# Altium PCB B.PcbDoc
Units mil, origin at the board's own origin, x right, y up, seen from the top; angles counter-clockwise.
Board outline 3543 x 2362 mil, 4 copper layers (Top Layer, Internal Plane 1, Internal Plane 2, Bottom Layer); 23 components, 16 nets, 97 pads, 5 vias.
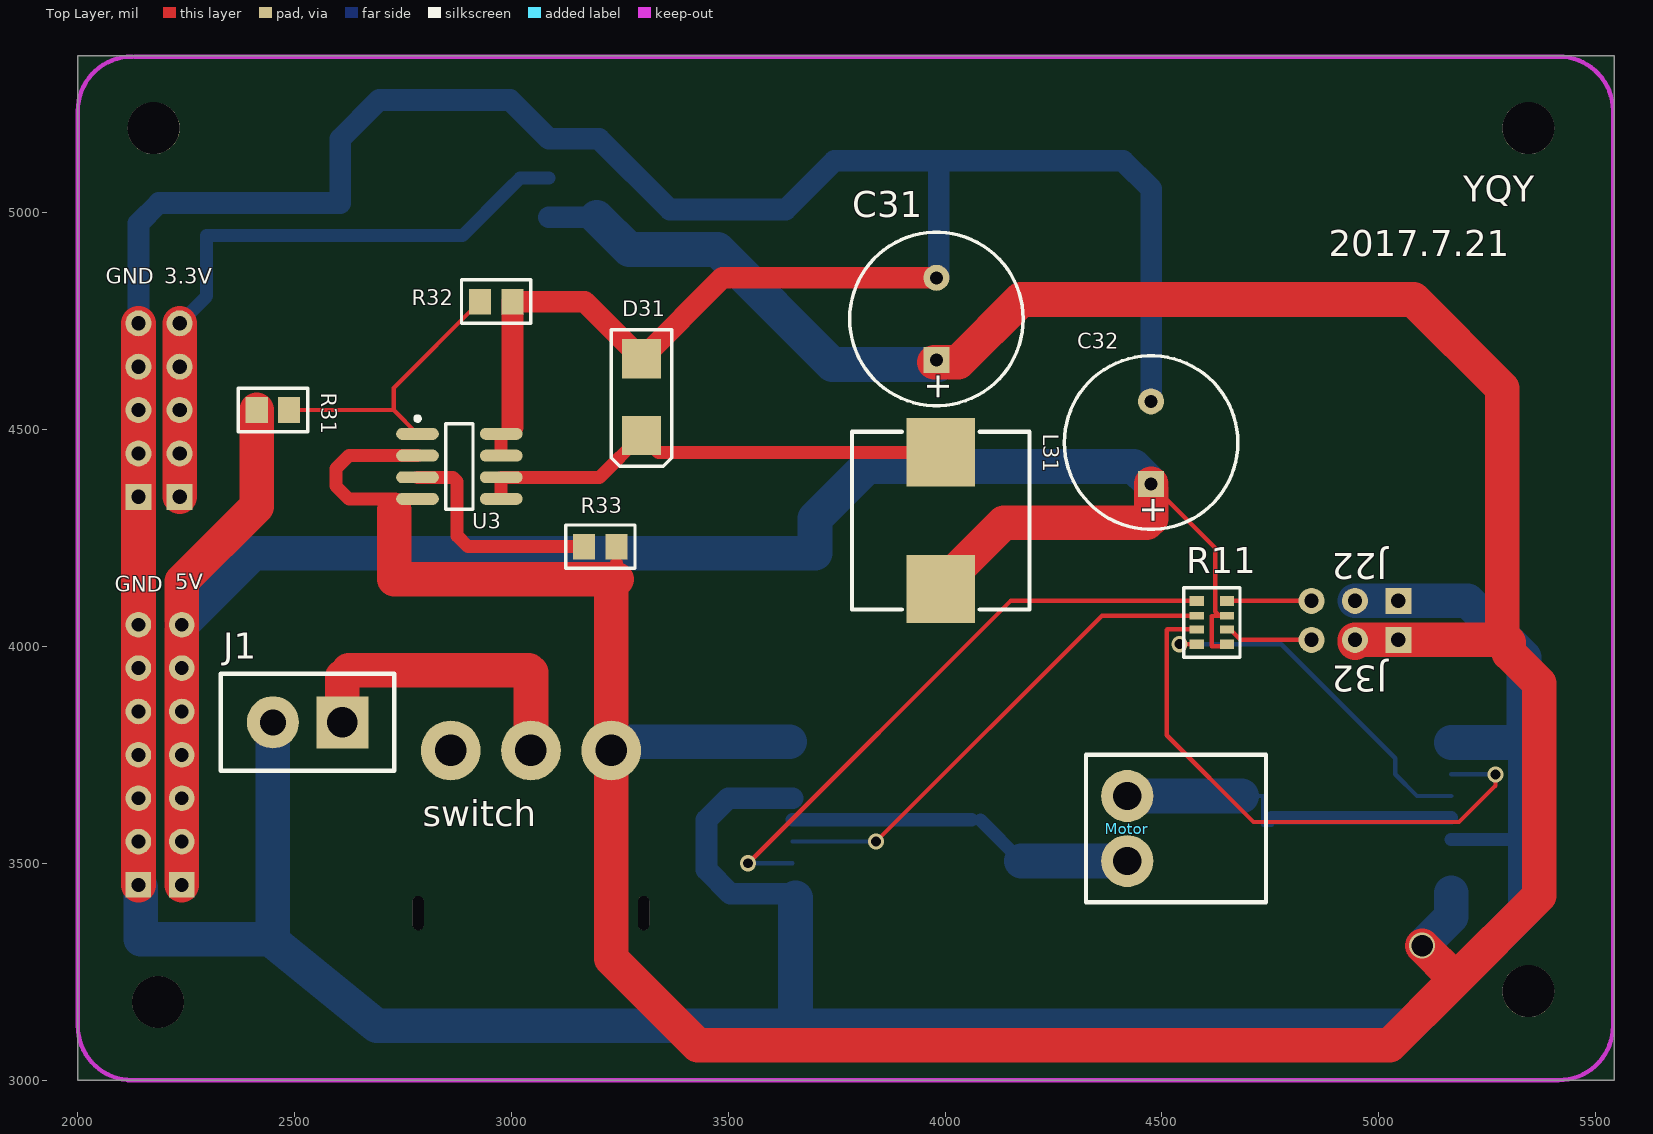
[diagram p0: Top Layer view]
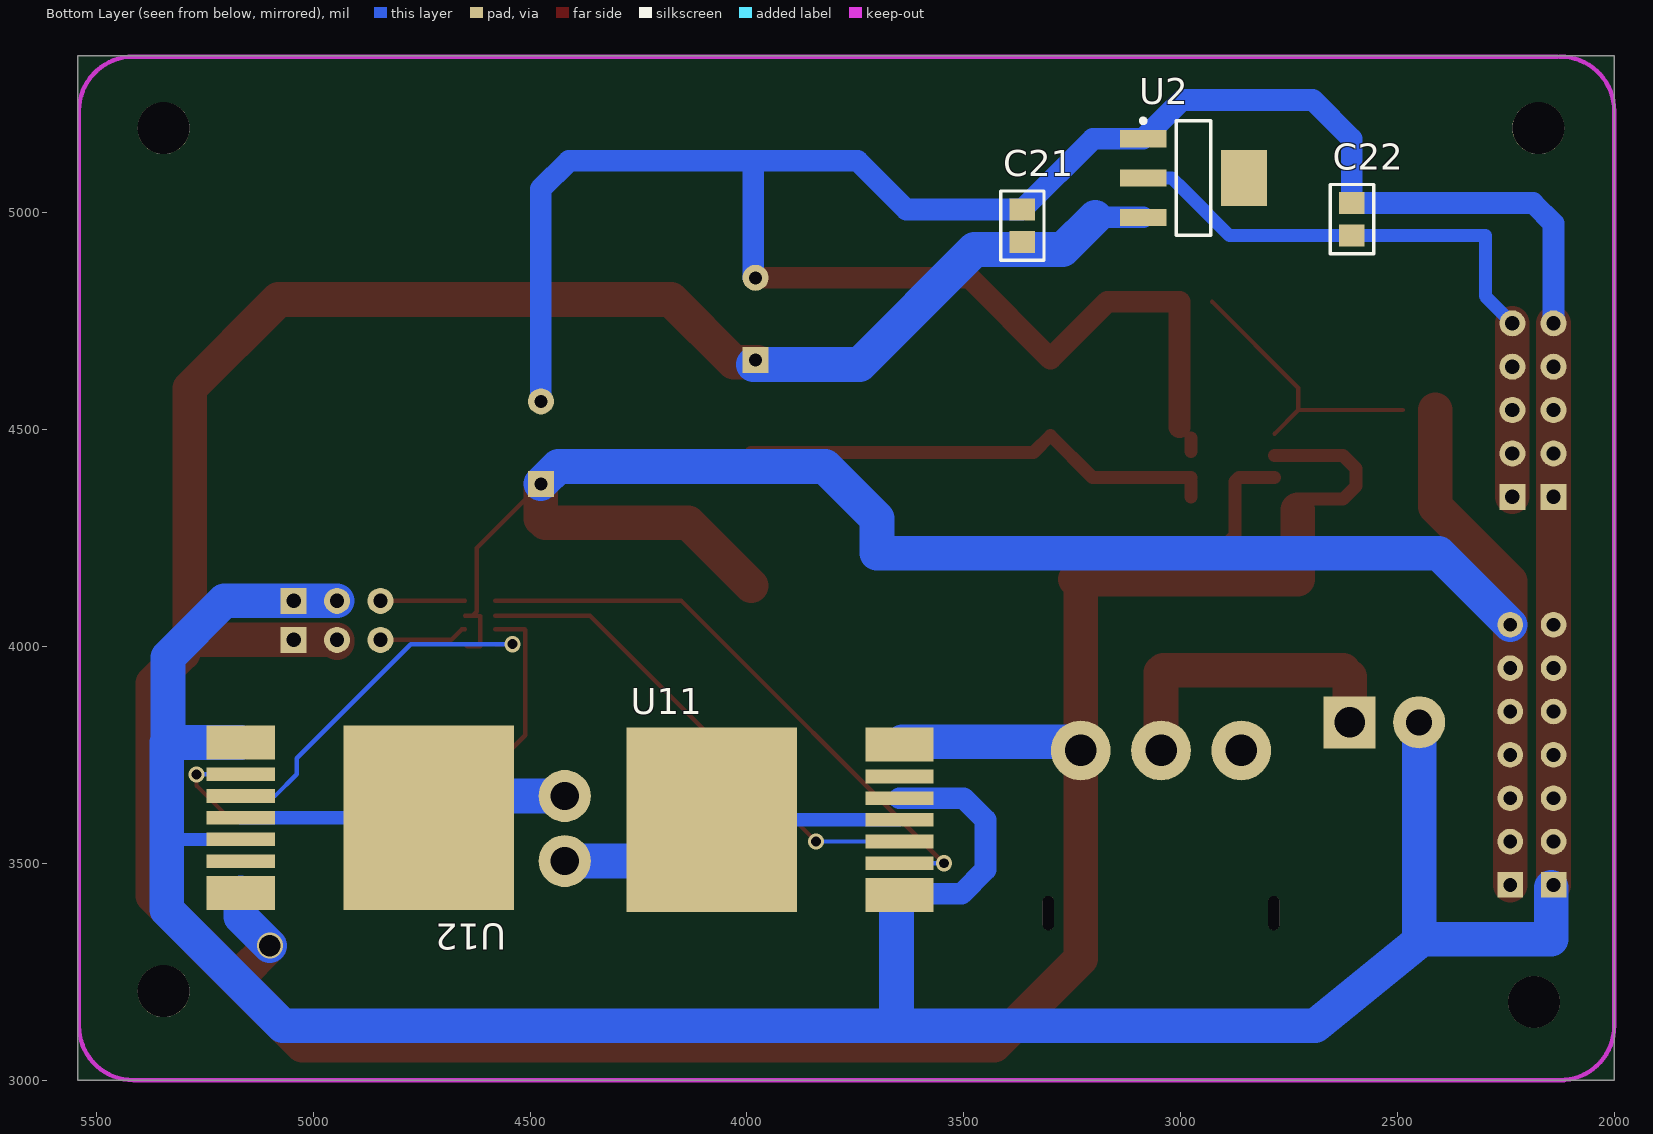
[diagram p1: Bottom Layer view, seen from below]
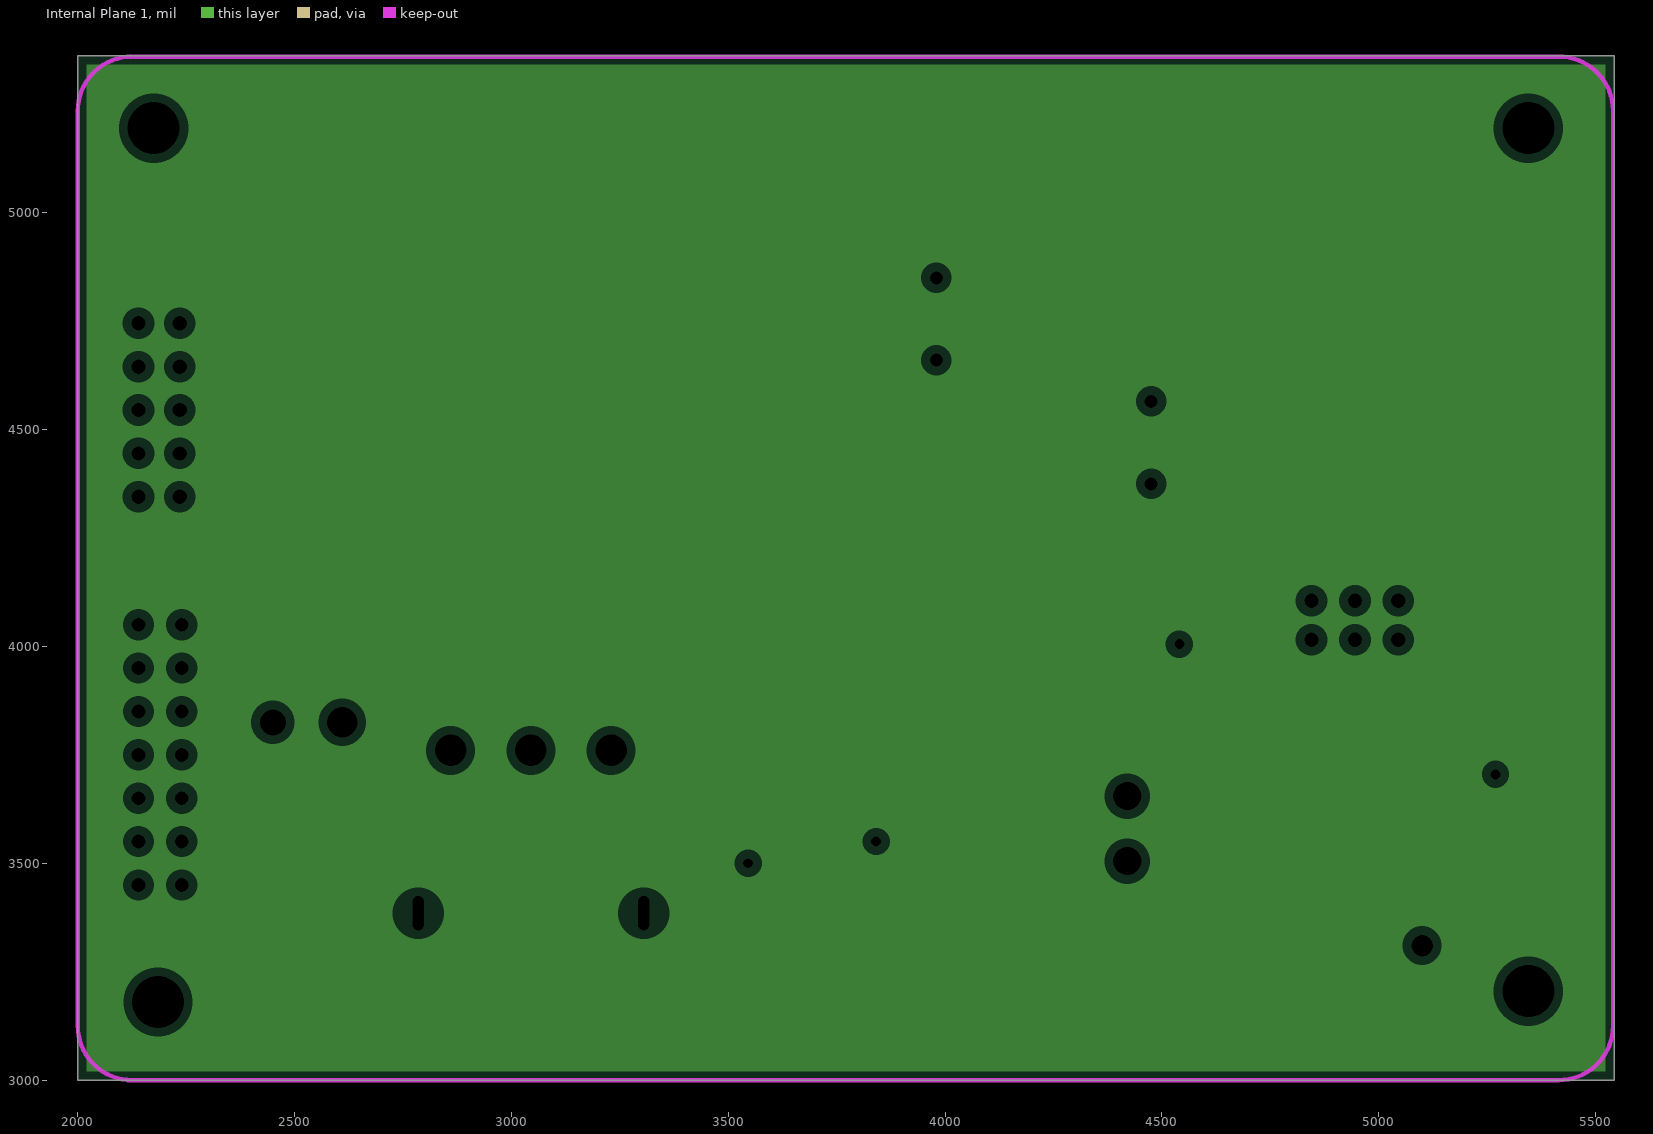
[diagram p2: Internal Plane 1, clearances drawn from the general rule]
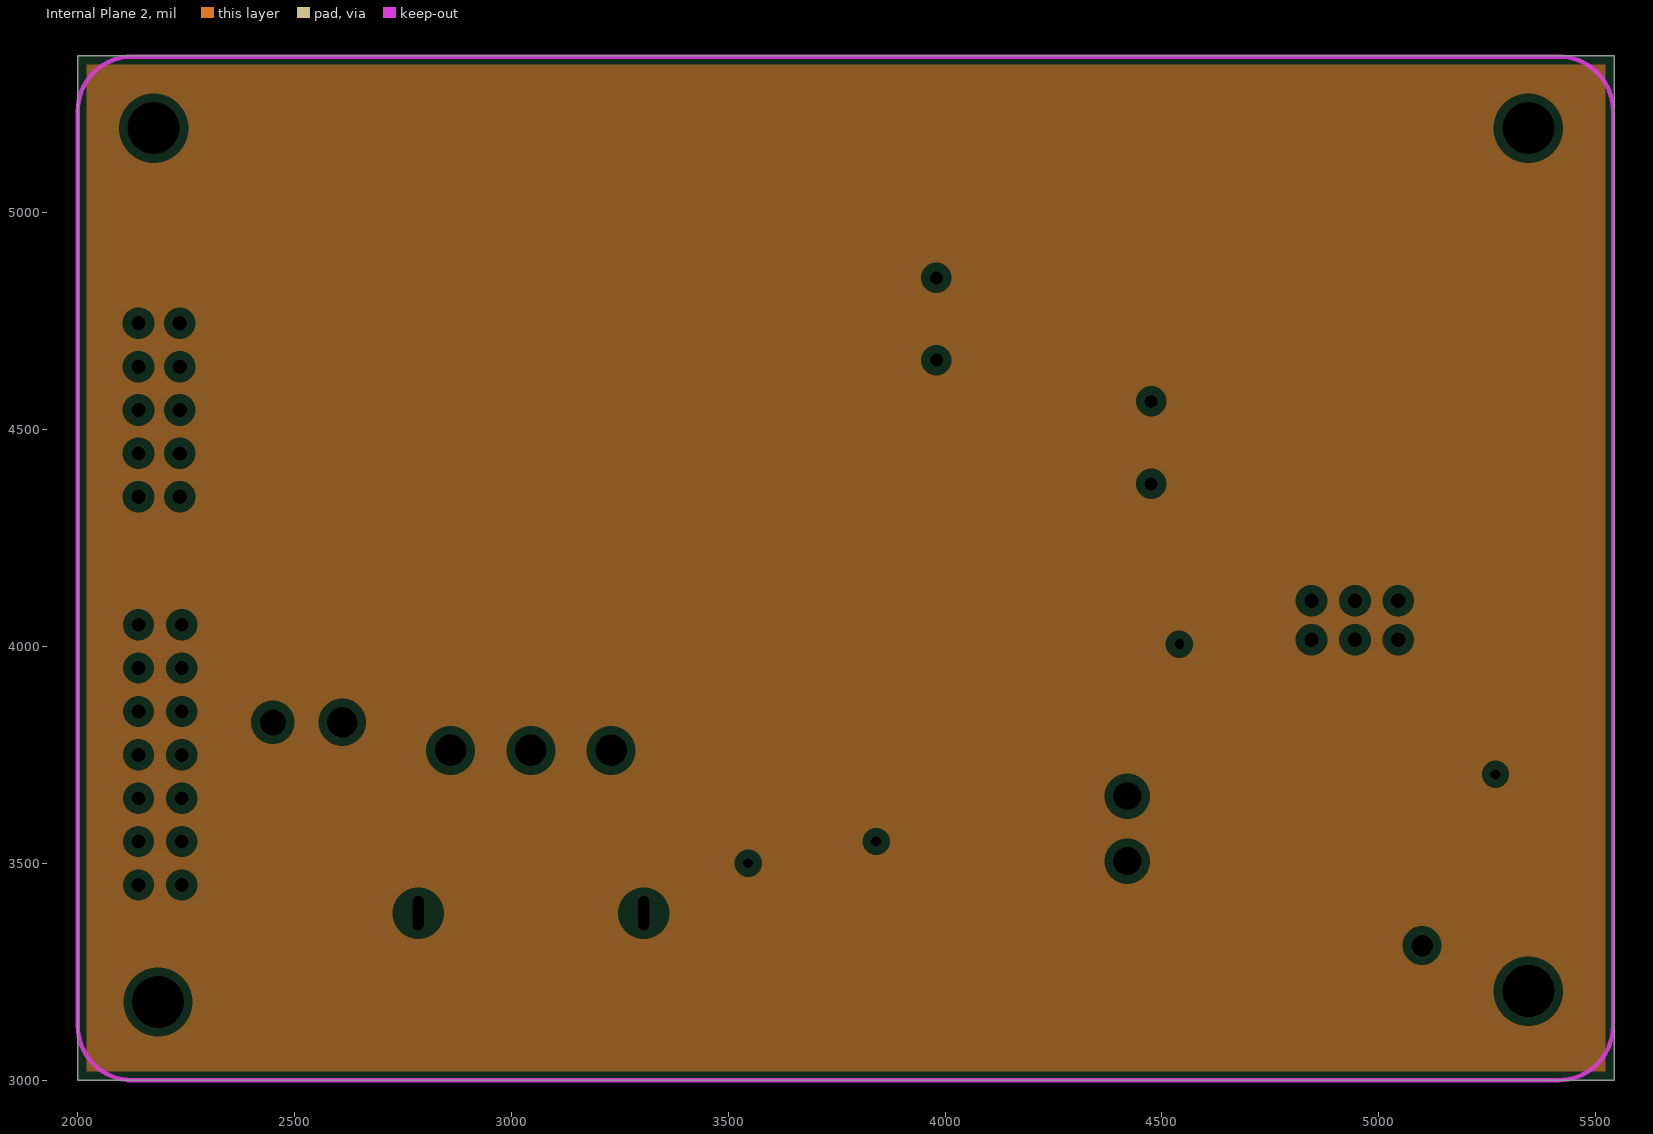
[diagram p3: Internal Plane 2, clearances drawn from the general rule]

## Layer stack, top to bottom
Top Layer: signal copper 1.4
Dielectric: dielectric 12.6, FR-4, Dk 4.8
Internal Plane 1: plane copper 1.4
Dielectric: dielectric 12.6, FR-4, Dk 4.8
Internal Plane 2: plane copper 1.4
Dielectric: dielectric 12.6, FR-4, Dk 4.8
Bottom Layer: signal copper 1.4

## Board outline
2000,3000 5543,3000 5543,5362 2000,5362

## Design rules (kind name [scope] priority, off if disabled: settings)
Clearance Clearance_1 [InComponent('U1')] p1: gap=7
Clearance Clearance_2 [InPolygon] p2: gap=20
Clearance [All] p3: gap=5
ComponentClearance [All] p1: gap=0 collisioncheckmode=3 verticalgap=0 showdistances=FALSE
HoleSize [All] p1: absolutevalues=TRUE maxlimit=150 minlimit=1 maxpercent=80.000 minpercent=20.000
MinimumSolderMaskSliver [All] p1: minsoldermaskwidth=0
PlaneClearance [All] p1: clearance=20
PlaneConnect [All] p1: planeconnectstyle=Relief reliefexpansion=20 reliefentries=4 reliefconductorwidth=10 reliefairgap=10
PolygonConnect [All] p1: connectstyle=Relief reliefconductorwidth=25 reliefentries=4 polygonreliefangle="90 Angle"
RoutingVias [All] p1: holewidth=23 width=37 viastyle="Through Hole" minholewidth=10 minwidth=20 maxholewidth=150 maxwidth=150
SilkToSilkClearance [All] p1: silktosilkclearance=0
SilkscreenOverComponentPads [All] p1: minsilkscreentomaskgap=5
SolderMaskExpansion [All] p1: expansion=0
Width [All] p1: maxlimit=120 minlimit=9 preferedwidth=10
21 further rules are at their usual default settings.

## Classes and differential pairs
component class YQYtest: 3.3V 5V C21 C22 D31 GND J1 J22 J32 L31 Motor R11 R31 R32 R33 switch U2 U3 U12

## Components (designator, comment, footprint, x,y, rotation, side; value= is the part's Value field where it differs from the comment)
3.3V "5 端口" SIP5 2235,4545 r90 top (schematic designator J31)
5V "7 端口" SIP7 2240,3700 r90 top (schematic designator J30)
C21 "10uF" 0805 3365,4970 r90 bottom
C22 "10uF" 0805 2605,4985 r90 bottom
C31 "470uF/25V" CAPPR0.19 3980,4755 r90 top
C32 "330uF/16V" CAPPR0.19 4475,4470 r90 top
D31 "SK54" SMC/DO-214AB 3300,4575 r270 top
GND "7 端口" SIP7 2140,3700 r90 top (schematic designator J20)
GND "5 端口" SIP5 2140,4545 r90 top (schematic designator J21)
J1 "电源接口" DC12V 2530,3825 r180 top
J22 "3 端口" SIP3 4945,4105 r180 top
J32 "3 端口" SIP3 4945,4015 r180 top
L31 "15uH" 4040电感 3990,4290 r270 top
Motor "马达接口" MOTOR-W 4420,3580 r90 top (schematic designator J11)
R11 "10K" PZ-4 4615,4055 r90 top
R31 "6.8K" 0805 2450,4545 r180 top
R32 "1.3K" 0805 2965,4795 r180 top
R33 "2.7K" 0805 3205,4230 r0 top
switch "开关" 5A120V开关 3045,3385 r0 top (schematic designator 拨动开关)
U2 "AMS1117-3.3" MP04A_M 2970,5080 r180 bottom
U3 "AS1015" SOP8_M 2880,4415 r0 top
U11 "BTN7971B" TO263-7-1#1 3845,3600 r90 bottom
U12 "BTN7971B" TO263-7-1#2 4970,3605 r270 bottom

## Footprints (in the part's own frame and the unit in brackets; to place one, negate y for a bottom-side part, rotate by r counter-clockwise, add the part's x,y. Pads: shape width x height; smd on the part's side, far side on the other; paste and mask are expansions set on the pad)
5A120V开关 [mm]
  round 3.5 hole 1.85: 1(0,9.53) 2(4.7,9.53) ""(-4.7,9.53)
  oval 0.66x2 hole 0.66 slot 2 at 90 deg: ""(-6.605,0) ""(6.605,0)
0805 [mm]
  rect 1.3x1.5 smd: 1(-0.95,0) 2(0.95,0)
  silkscreen extent -2.03,-1.27 2.03,1.27
4040电感 [mm]
  rect 4x4 smd: 1(-4,0) 2(4,0)
  silkscreen extent -5.2,-5.2 5.2,5.2
CAPPR0.19 [mil]
  rect 60x60 hole 30: 1(-95,0)
  round 60 hole 30: 2(95,0)
  silkscreen extent -200,-200 200,200
DC12V [mil]
  rect 120x120 hole 70: 1(-80,0)
  round 120 hole 60: 2(80,0)
  silkscreen extent -200,-112 200,112
MOTOR-W [mil]
  round 120 hole 65: 1(-75,0) 2(75,0)
  silkscreen extent -170,-320 170,95
MP04A_M [mm] "SOT223, 4-Leads, Body 6.5x3.5mm, Pitch 2.3mm, Lead Span 7mm, IPC Low Density"
  rect 2.7x1 smd: 1(-2.95,2.3) 2(-2.95,0) 3(-2.95,-2.3)
  rect 2.7x3.3 smd: 4(2.95,0)
  silkscreen extent -3.08,-3.35 1.02,3.47
PZ-4 [mm] "WWW.OURAVR.COM"
  rect 0.58x0.835 smd: 1(-1.27,-0.887) 4(1.27,-0.887) 5(1.27,0.887) 8(-1.27,0.887)
  rect 0.457x0.835 smd: 2(-0.4,-0.887) 3(0.4,-0.887) 6(0.4,0.887) 7(-0.4,0.887)
  silkscreen extent -2.03,-1.65 2.03,1.65
SIP3 [mil]
  rect 60x60 hole 33: 1(-100,0)
  round 60 hole 33: 2(0,0) 3(100,0)
SIP5 [mil]
  rect 60x60 hole 33: 1(-200,0)
  round 60 hole 33: 2(-100,0) 3(0,0) 4(100,0) 5(200,0)
SIP7 [mm]
  rect 1.5x1.5 hole 0.813: 1(-6.35,0)
  round 1.5 hole 0.813: 2(-3.81,0) 3(-1.27,0) 4(1.27,0) 5(3.81,0) 6(6.35,0) 7(8.89,0)
SMC/DO-214AB [mm]
  rect 2.3x2.3 smd: 1(-2.25,0) 2(2.25,0)
  silkscreen extent -3.94,-1.78 4.06,1.78
SOP8_M [mm] "SOIC, 8-Leads, Body 4.9x3.9mm, Pitch 1.27mm, IPC Low Density"
  oval 2.5x0.7 smd: 1(-2.45,1.905) 2(-2.45,0.635) 3(-2.45,-0.635) 4(-2.45,-1.905) 5(2.45,-1.905) 6(2.45,-0.635) 7(2.45,0.635) 8(2.45,1.905)
  silkscreen extent -2.57,-2.5 0.8,2.93
TO263-7-1#1 [mm]
  rect 1.99x4 smd: 1(-4.405,-5) 7(4.405,-5)
  rect 0.8x4 smd: 2(-2.54,-5) 3(-1.27,-5) 4(0,-5) 5(1.27,-5) 6(2.54,-5)
  rect 10.8x10 smd: 4(0,6)
  Top Layer lines w0.8: 0,-5 0,-2.692 0,-2.042 0,-2.007 0,5.486
TO263-7-1#2 [mm]
  rect 1.99x4 smd: 1(-4.405,-5) 7(4.405,-5)
  rect 0.8x4 smd: 2(-2.54,-5) 3(-1.27,-5) 4(0,-5) 5(1.27,-5) 6(2.54,-5)
  rect 10.8x10 smd: 4(0,6)
  Top Layer lines w0.8: 0,5.5 0,-5

## Part data
3.3V GND: library part "5 端?"
5V GND: library part "7 端?"
C21 C22: library part C
C31 C32: library part C+
D31: library part D
J1: library part 电?
J22 J32: library part "3 端?"
Motor: library part 马?
R11: library part "Res Pack", "Isolated Resistor Network - Parts"
R31 R32 R33: library part R
U2: library part LM1117MP-3.3, "800mA Low-Dropout Linear Regulator"

## Free pads (board coordinates)
  round 120 hole 120: 0(2175,5195) 0(2185,3180) 0(5345,3205) 0(5345,5195)

## Via types
v1: diameter 37, hole 23, Top Layer to Bottom Layer, 4 vias
v2: diameter 60, hole 50, Top Layer to Bottom Layer, 1 vias

## Nets (pads, with @x,y where several pads share a name; then routed paths per layer and width w, separated by ;. In a path a pad name is that pad's centre, name@x,y a point inside that pad or via, vN(x,y) a via of type N, cw(c..) or ccw(c..) an arc to the next point about the centre after c; other vN are vias at no path point)
BAT: J1.1 switch.1 | length 721
  Top Layer w20: 2610,3930 2625,3945
  Top Layer w80: J1.1 2610,3930 ; 2625,3945 3040,3945 ; switch.1 3045,3940
GND: C21.2 C22.2 C31.2 C32.2 D31.1 GND.1 GND.2 GND.3 GND.4 GND.5 GND.6 GND.7 J1.2 J22.1 J22.2 R32.1 U2.1 U3.7 U3.8 U11.1 U11.5 U12.1 U12.5 | length 12700.9
  Top Layer w10: U3.7 U3.7@2976.46,4450
  Top Layer w30: U3.7@2976.46,4450 U3.8@2976.46,4480
  Top Layer w50: 3002.4,4505 R32.1 3168.58,4795 D31.1 3486.42,4850 C31.2
  Top Layer w80: GND.1@2140,3450 2140,3550 2140,3650 2140,3750 2140,3850 GND.6 GND.7 2140,4345 2140,4445 2140,4545 2140,4645 GND.5@2140,4745
  Bottom Layer w10: GND.1@2140,3450 2140,3445 GND.1@2145,3445 ; 2450,3320 2450,3325 ; J1.2 J1.2@2450,3840 ; U11.1 3652,3426.57 3652,3419.72 U11.1@3655,3419.72 ; 5330,3781.85 5335,3781.85
  Bottom Layer w30: U11.1@3644.72,3430 U11.1 ; U12.5 5337.5,3555
  Bottom Layer w50: GND.5@2140,4745 2140,4975 2187.4,5022.4 C22.2 2605,5170 2695,5260 2996.69,5260 U2.1@3080.85,5175.85 ; U2.1 3201.85,5170.55 C21.2 3632.4,5007.4 3745,5120 4410,5120 4475,5055 C32.2 ; U11.1@3644.72,3430 3505,3430 3450,3485 3450,3600 3500,3650 U11.5 ; C31.2@3985,4850 3985,5115
  Bottom Layer w80: GND.1@2145,3445 2145,3325 2450,3325 J1.2@2450,3840 ; 2450,3320 2690,3125 5070,3125 5337.5,3392.5 5337.5,3555 5337.5,3778.43 U12.1 ; 3655,3125 U11.1@3655,3419.72 ; J22.2 J22.1 5205,4105 5335,3975 5335,3781.85
M1A: Motor.1 U11.4 | length 398.4
  Bottom Layer w10: U11.4@4061,3600 U11.4@4081.22,3600
  Bottom Layer w30: U11.4@4081.22,3600 U11.4@4176.22,3505
  Bottom Layer w80: U11.4@4176.22,3505 Motor.1
M1B: Motor.2 U12.4 | length 415.5
  Bottom Layer w10: U12.4@4683.78,3655 4733.78,3655 4733.78,3605 4733.78,3589 4753.46,3589 U12.4@4753.46,3605
  Bottom Layer w80: Motor.2 U12.4@4683.78,3655
NetD31_2: D31.2 L31.1 U3.5 U3.6 | length 1123.1
  Top Layer w10: U3.5 U3.5@2976.46,4345
  Top Layer w30: U3.5@2976.46,4345 2976.46,4381.46 U3.6@2985,4390 ; U3.6 U3.6@2985,4390 ; L31.1 3338.94,4447.48 D31.2 3203.58,4390 U3.6@2985,4390
NetR11_5: R11.5 U11.2 | length 1386.8
  Top Layer w10: v1(3546,3500) 4151,4105 R11.5
  Bottom Layer w10: v1(3546,3500) U11.2
NetR11_6: R11.6 U11.3 | length 1147.6
  Top Layer w10: v1(3841,3550) 4361.75,4070.75 R11.6
  Bottom Layer w10: U11.3 v1(3841,3550)
NetR11_7: R11.7 U12.2 | length 1316.4
  Top Layer w10: R11.7 4512.25,4039.25 4511,4038 4511,3795 4711,3595 5185,3595 5269,3679 v1(5269,3705)
  Bottom Layer w10: U12.2 v1(5269,3705)
NetR11_8: R11.8 U12.3 | length 833.6
  Top Layer w10: v1(4540,4005) R11.8
  Bottom Layer w10: v1(4540,4005) 4775,4005 5038,3742 5038,3705 5088,3655 U12.3
NetR31_1: R31.1 R32.2 U3.1 | length 651.4
  Top Layer w10: R31.1 2728.54,4545 ; U3.1 2728.54,4545 ; R32.2 2728.54,4595.95 2728.54,4545
NetR33_1: R33.1 U3.3 | length 523.6
  Top Layer w30: U3.3 2865,4390 2875,4380 2875,4255 2900,4230 R33.1
PWM1: J22.3 R11.4 | length 195.1
  Top Layer w10: R11.4 J22.3
PWM2: J32.3 R11.2 | length 205.1
  Top Layer w10: R11.2 4657.67,4039.25 4681.92,4015 J32.3
VCC: 5V.1 5V.2 5V.3 5V.4 5V.5 5V.6 5V.7 C32.1 L31.2 R11.1 R11.3 R31.2 | length 4782.2
  Top Layer w10: C32.1 4623,4227 4623,4079.75 4632,4070.75 R11.3 4625.75,4070.75 4625,4070 4615,4070 4615,4000 4644.92,4000 R11.1
  Top Layer w50: L31.2 L31.2@3990,4140 ; 4465,4285 4475,4295
  Top Layer w80: 5V.1 5V.2 5V.3 5V.4 5V.5 5V.6 5V.7 2240,4150 2412.6,4322.6 R31.2 ; L31.2@3990,4140 4135,4285 4465,4285 ; 4475,4295 C32.1
  Bottom Layer w80: 5V.7 2405,4215 3700,4215 3700,4295 3820,4415 4435,4415 C32.1
VDD: 3.3V.1 3.3V.2 3.3V.3 3.3V.4 3.3V.5 C22.1 U2.2 | length 1472
  Top Layer w80: 3.3V.1 3.3V.2 3.3V.3 3.3V.4 3.3V.5
  Bottom Layer w30: 3.3V.5 2297.4,4807.4 2297.4,4947.6 C22.1 2887.6,4947.6 2993,5053 3020,5080 U2.2
VIN: C21.1 C31.1 J32.1 J32.2 R33.2 switch.2 U2.3 U3.2 U3.4 U11.7 U12.7 | length 9260.8
  Top Layer w10: 3230.04,4167.36 3223.9,4173.5 3242.4,4192 R33.2 ; switch.2@3242.4,3782.83 3277.17,3782.83 switch.2@3286.57,3773.43 ; C31.1@3975,4655 3980,4655 C31.1 ; J32.2@4945,4008.93 5045,4008.93 J32.1
  Top Layer w30: 2730,4340 2625,4340 2595,4370 2595,4410 2625,4440 U3.2 ; 3242.4,4155 3242.4,4192
  Top Layer w80: 2730,4315 2730,4155 3242.4,4155 ; 3230.04,4139.96 switch.2 3230.04,3279.96 3430,3080 5025,3080 5170,3225 ; C31.1@3975,4655 4030,4655 4175,4800 5080,4800 5285,4595 5285,4023.93 5300,4008.93 5300,3985 5370,3915 5370,3425 5170,3225 ; J32.2@4945,4008.93 J32.2 J32.1 5270,4015 ; v2(5100,3310) 5170,3240 5170,3225
  Bottom Layer w50: U2.3 3197,4989.45
  Bottom Layer w80: 3197,4989.45 3271.45,4915 3475,4915 3740,4650 C31.1@3985,4650 ; switch.2@3235.04,3780.2 U11.7@3641.38,3780.2 ; v2(5100,3310) 5166.85,3376.85 U12.7
pads on no net: switch. U2.4 U11.6 U12.6

## Polygon pours and split planes (outlines as drawn)
no net on Internal Plane 1 (split plane): 5522.9,3020.1 2020.1,3020.1 2020.1,5341.9 5522.9,5341.9
no net on Internal Plane 2 (split plane): 5522.9,3020.1 2020.1,3020.1 2020.1,5341.9 5522.9,5341.9

## Keep-outs
Keep-Out Layer:
  lines w10: 2115,3000 5415,3000 ccw(c5415,3125) 5540,3125 ; 2125,3000 cw(c2125,3125) 2000,3125 2000,5235 cw(c2125,5235) 2125,5360 ; 2130,5360 5425,5360 ; 5415,5360 cw(c5415,5235) 5540,5235 5540,3115

## Other copper
Bottom Layer:
  text "5347" at 3760,1430 h60

## Silkscreen, mask and mechanical layers (free items; w line width, h text height)
Top Overlay:
  text "YQY" at 5195,5025 h60
  text "2017.7.21" at 4885,4900 h60
Drill Drawing:
  text ".LEGEND" at -922,3165 h60
  text "Drill Drawing." at -922,3065 h60

## Text inside footprints (layer, text, board x,y; h text height)
C31: Top Overlay "+" at 4010,4565 h59.06 r90
C32: Top Overlay "+" at 4505,4280 h59.06 r90